# EAGLE board diode array (EAGLE 6.5.0)
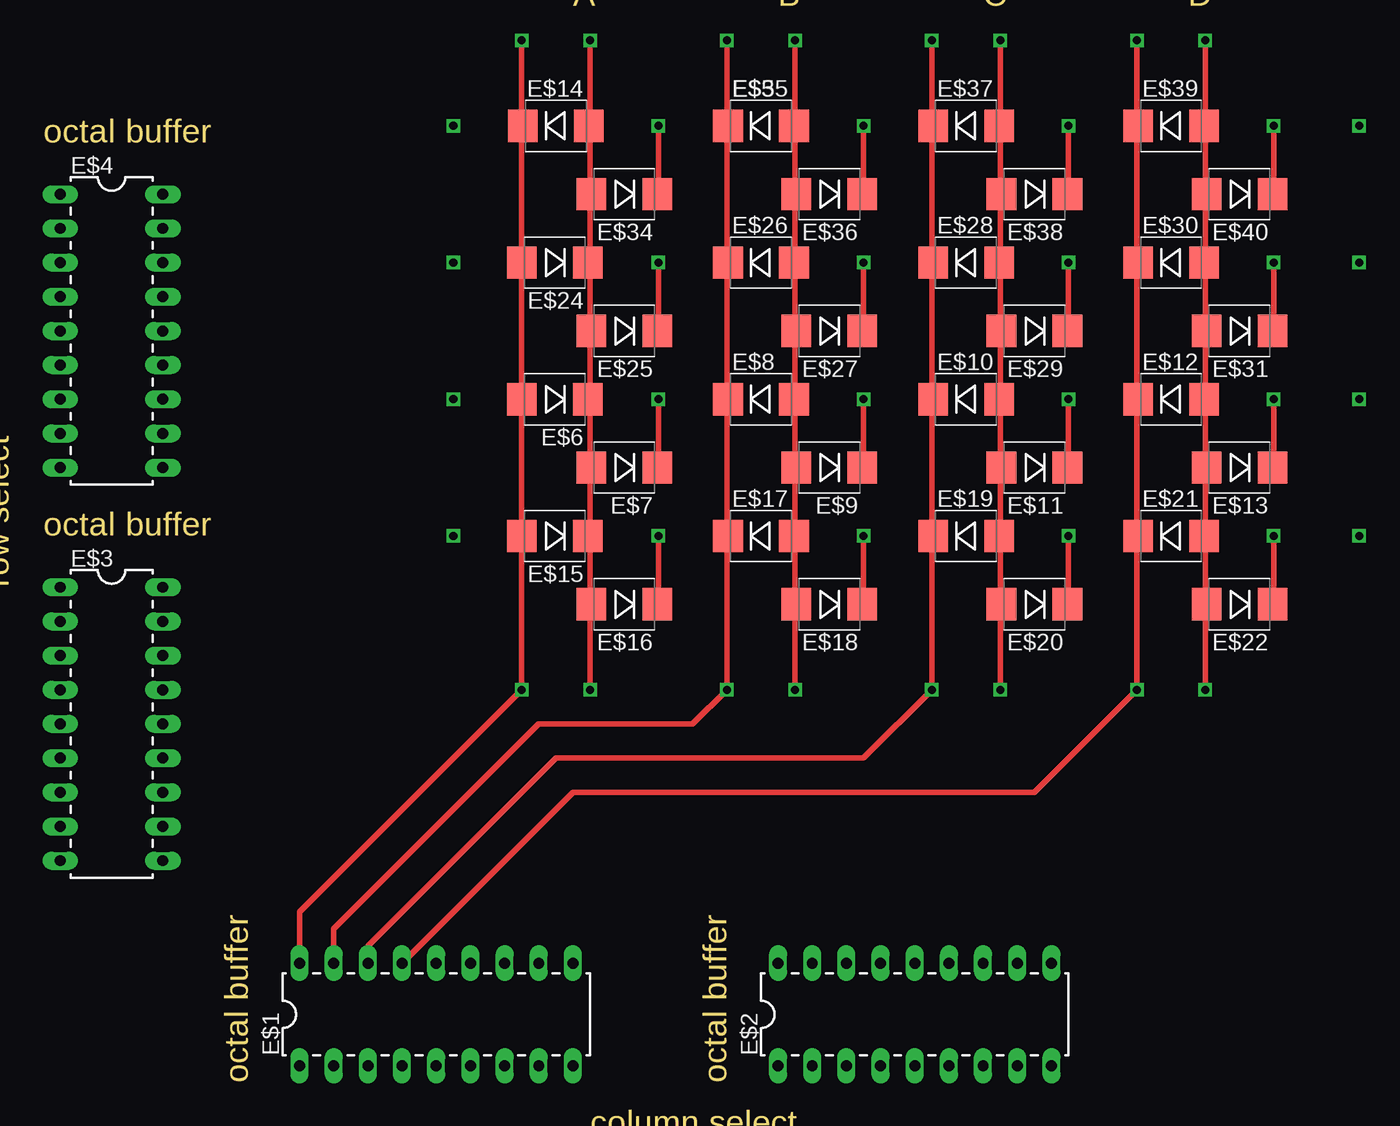
[diagram p0: board, top side]
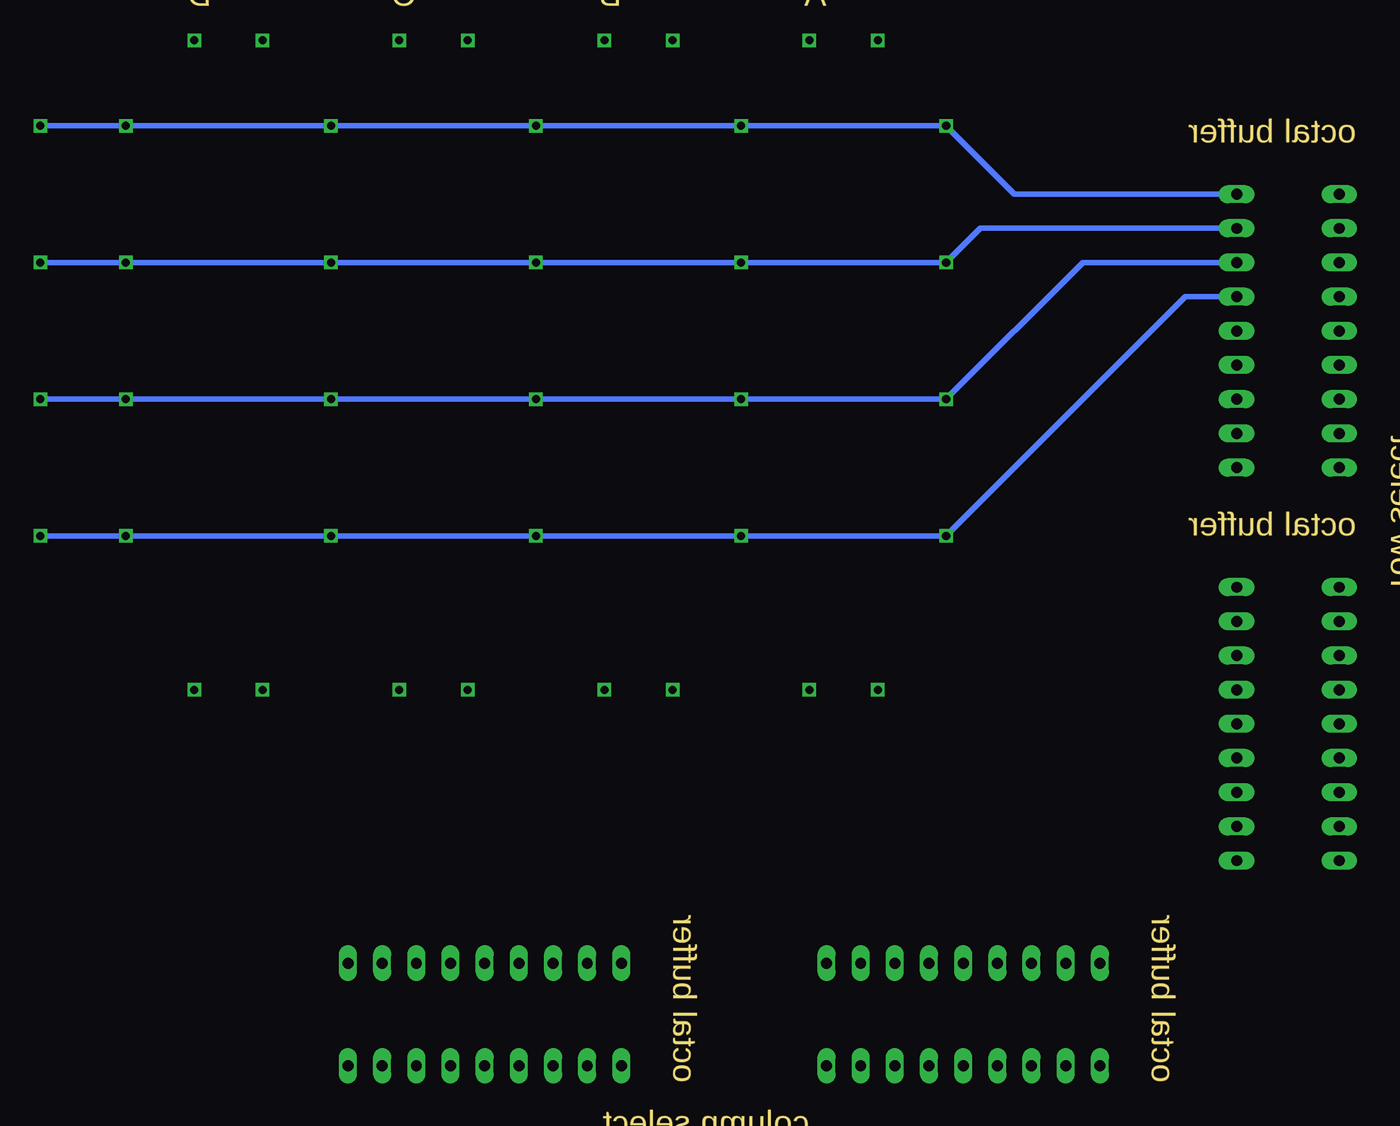
[diagram p1: board, bottom side, seen from below]

No outline drawn. Coordinates in mm, seen from the top.
Copper layers (1*16): Top 0.035mm / dielectric 1.5mm / Bottom 0.035mm
Design rules "default": minimum track width 10mil, minimum drill 24mil, track to track 8mil, track to pad 8mil, pad to pad 8mil, via to via 8mil, smd to smd 8mil, copper to edge 40mil, drill to drill 8mil, minimum pad ring 10mil, minimum via ring 8mil, stop-mask expansion 4mil, vias tented up to drill 0mil, thermal gap 10mil

## Footprints (pad centres in the part's own frame; a part is rotated, then mirrored left to right if it is on the bottom)
DIL18 = drill 0.813 long: 1 -10.16,-3.81; 2 -7.62,-3.81; 3 -5.08,-3.81; 4 -2.54,-3.81; 5 0,-3.81; 6 2.54,-3.81; 7 5.08,-3.81; 8 7.62,-3.81; 9 10.16,-3.81; 10 10.16,3.81; 11 7.62,3.81; 12 5.08,3.81; 13 2.54,3.81; 14 0,3.81; 15 -2.54,3.81; 16 -5.08,3.81; 17 -7.62,3.81; 18 -10.16,3.81
DIODE-HV = smd 2.2 x 2.4: A 2.454,0; C -2.454,0

## Placement (x,y rotation side)
E$1  [DIL18]  29.21,10.16 0 top
E$2  [DIL18]  64.77,10.16 0 top
E$3  [DIL18]  5.08,31.75 270 top
E$4  [DIL18]  5.08,60.96 270 top
E$5  [DIODE-HV]  53.34,76.2 0 top
E$6  [DIODE-HV]  38.02,55.87 180 top
E$7  [DIODE-HV]  43.18,50.8 180 top
E$8  [DIODE-HV]  53.34,55.88 0 top
E$9  [DIODE-HV]  58.42,50.8 180 top
E$10  [DIODE-HV]  68.58,55.88 0 top
E$11  [DIODE-HV]  73.66,50.8 180 top
E$12  [DIODE-HV]  83.82,55.88 0 top
E$13  [DIODE-HV]  88.9,50.8 180 top
E$14  [DIODE-HV]  38.1,76.2 0 top
E$15  [DIODE-HV]  38.02,45.71 180 top
E$16  [DIODE-HV]  43.18,40.64 180 top
E$17  [DIODE-HV]  53.34,45.72 0 top
E$18  [DIODE-HV]  58.42,40.64 180 top
E$19  [DIODE-HV]  68.58,45.72 0 top
E$20  [DIODE-HV]  73.66,40.64 180 top
E$21  [DIODE-HV]  83.82,45.72 0 top
E$22  [DIODE-HV]  88.9,40.64 180 top
E$24  [DIODE-HV]  38.02,66.03 180 top
E$25  [DIODE-HV]  43.18,60.96 180 top
E$26  [DIODE-HV]  53.34,66.04 0 top
E$27  [DIODE-HV]  58.42,60.96 180 top
E$28  [DIODE-HV]  68.58,66.04 0 top
E$29  [DIODE-HV]  73.66,60.96 180 top
E$30  [DIODE-HV]  83.82,66.04 0 top
E$31  [DIODE-HV]  88.9,60.96 180 top
E$34  [DIODE-HV]  43.18,71.12 180 top
E$35  [DIODE-HV]  53.34,76.2 0 top
E$36  [DIODE-HV]  58.42,71.12 180 top
E$37  [DIODE-HV]  68.58,76.2 0 top
E$38  [DIODE-HV]  73.66,71.12 180 top
E$39  [DIODE-HV]  83.82,76.2 0 top
E$40  [DIODE-HV]  88.9,71.12 180 top

## Library data of the parts
E$1-E$4 = SparkFun-DigitalIC
E$5-E$22 E$24-E$31 E$34-E$40 = SparkFun-DiscreteSemi

## Nets
S$1: E$1.17
S$2: E$1.16
S$4: E$1.15
S$24: E$1.18
S$40: E$4.18
S$41: E$4.17
S$42: E$4.16
S$43: E$4.15

## Tracks (layer width: path | path; a pad name or v marks a point on that pad's centre or on a via)
S$1  (via drill 0.6)
  Top 0.406: E$1.17 21.59,16.51 36.83,31.75 48.26,31.75 v50.8,34.29 v50.8,82.55
S$2  (via drill 0.6)
  Top 0.406: E$1.16 24.13,15.24 38.1,29.21 60.96,29.21 v66.04,34.29 v66.04,82.55
S$4  (via drill 0.6)
  Top 0.406: E$1.15 39.37,26.67 73.66,26.67 v81.28,34.29 v81.28,82.55
S$13  (via drill 0.6)
  Top 0.406: 45.72,50.8 v45.72,55.88
S$17  (via drill 0.6)
  Top 0.406: 45.72,40.64 v45.72,45.72
S$24  (via drill 0.6)
  Top 0.406: v35.56,82.55 v35.56,34.29 19.05,17.78 E$1.18
S$32  (via drill 0.6)
  Top 0.406: v40.64,34.29 v40.64,82.55
S$33  (via drill 0.6)
  Top 0.406: v55.88,34.29 v55.88,82.55
S$34  (via drill 0.6)
  Top 0.406: v71.12,34.29 v71.12,82.55
S$35  (via drill 0.6)
  Top 0.406: v86.36,34.29 v86.36,82.55
S$40  (via drill 0.6)
  Top 0.406: 45.72,71.12 v45.72,76.2 | 60.96,71.12 v60.96,76.2 | 76.2,71.12 v76.2,76.2 | 91.44,71.12 v91.44,76.2
  Bottom 0.406: v97.79,76.2 v91.44,76.2 v76.2,76.2 v60.96,76.2 v45.72,76.2 v30.48,76.2 25.4,71.12 E$4.18
S$41  (via drill 0.6)
  Top 0.406: 45.72,60.96 v45.72,66.04 | 60.96,60.96 v60.96,66.04 | 76.2,60.96 v76.2,66.04 | 91.44,60.96 v91.44,66.04
  Bottom 0.406: v97.79,66.04 v91.44,66.04 v76.2,66.04 v60.96,66.04 v45.72,66.04 v30.48,66.04 27.94,68.58 E$4.17
S$42  (via drill 0.6)
  Top 0.406: 60.96,50.8 v60.96,55.88 | 76.2,50.8 v76.2,55.88 | 91.44,50.8 v91.44,55.88
  Bottom 0.406: v97.79,55.88 v91.44,55.88 v76.2,55.88 v60.96,55.88 v30.48,55.88 20.32,66.04 E$4.16
S$43  (via drill 0.6)
  Top 0.406: 60.96,40.64 v60.96,45.72 | 76.2,40.64 v76.2,45.72 | 91.44,40.64 v91.44,45.72
  Bottom 0.406: v97.79,45.72 v91.44,45.72 v76.2,45.72 v60.96,45.72 v30.48,45.72 12.7,63.5 E$4.15

## Text on the board
Dimension: diode routing array 1 of 16 | for each color | output to driver | A | B | C | D | octal buffer | octal buffer | row select | octal buffer | octal buffer | column select